# EAGLE board isp (EAGLE 9.6.2), part 1 of 2
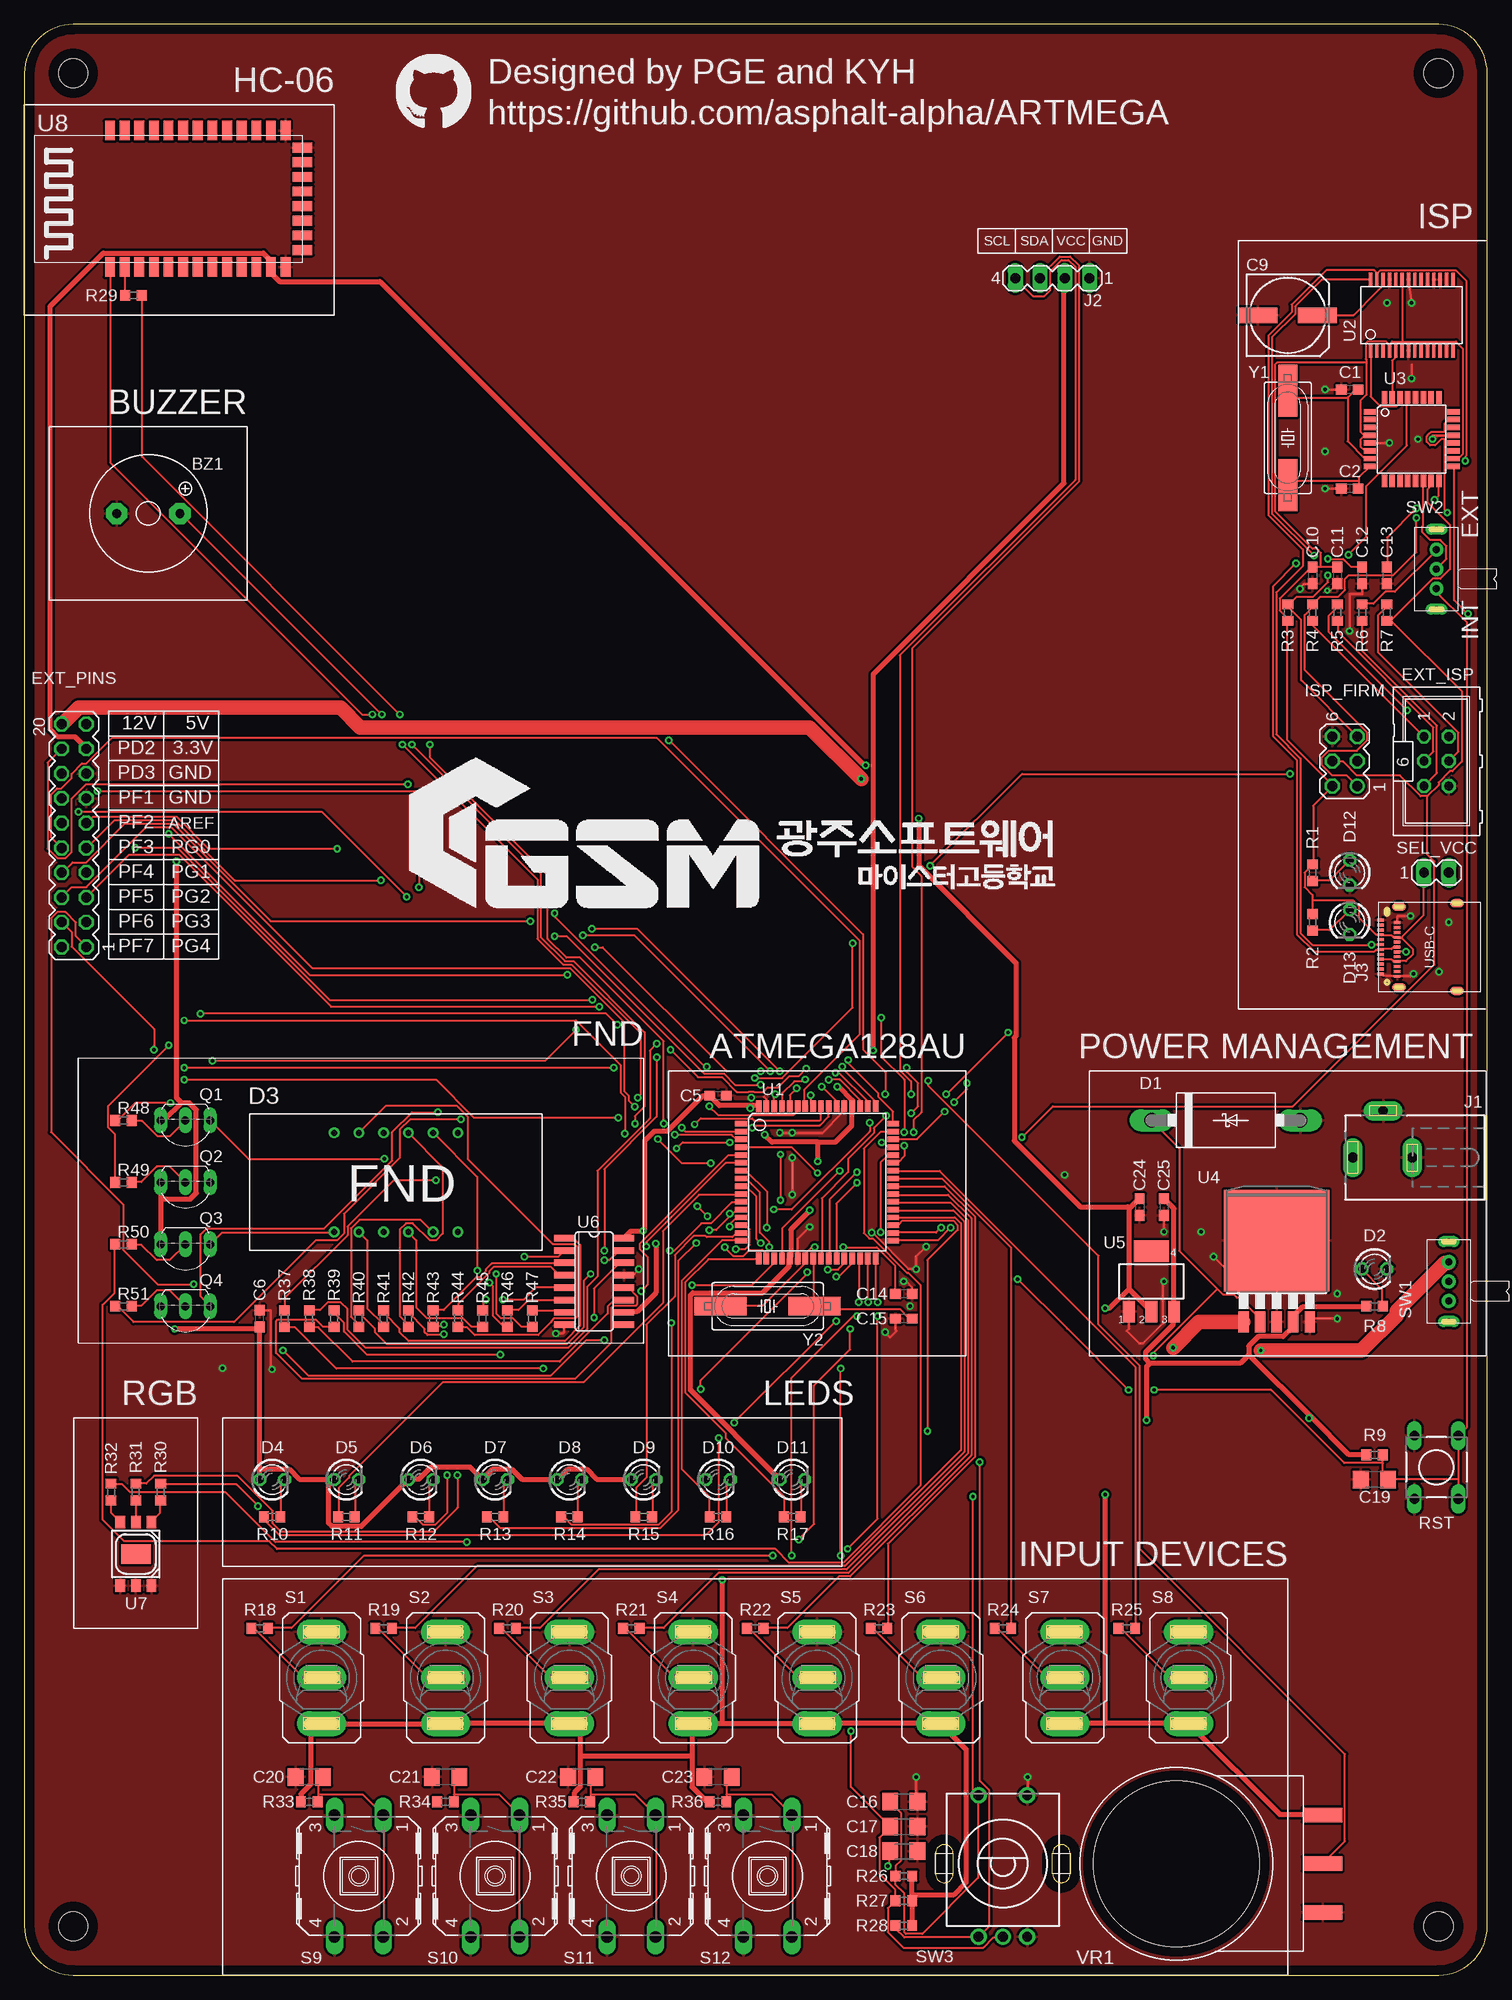
[diagram p0: board, top side]
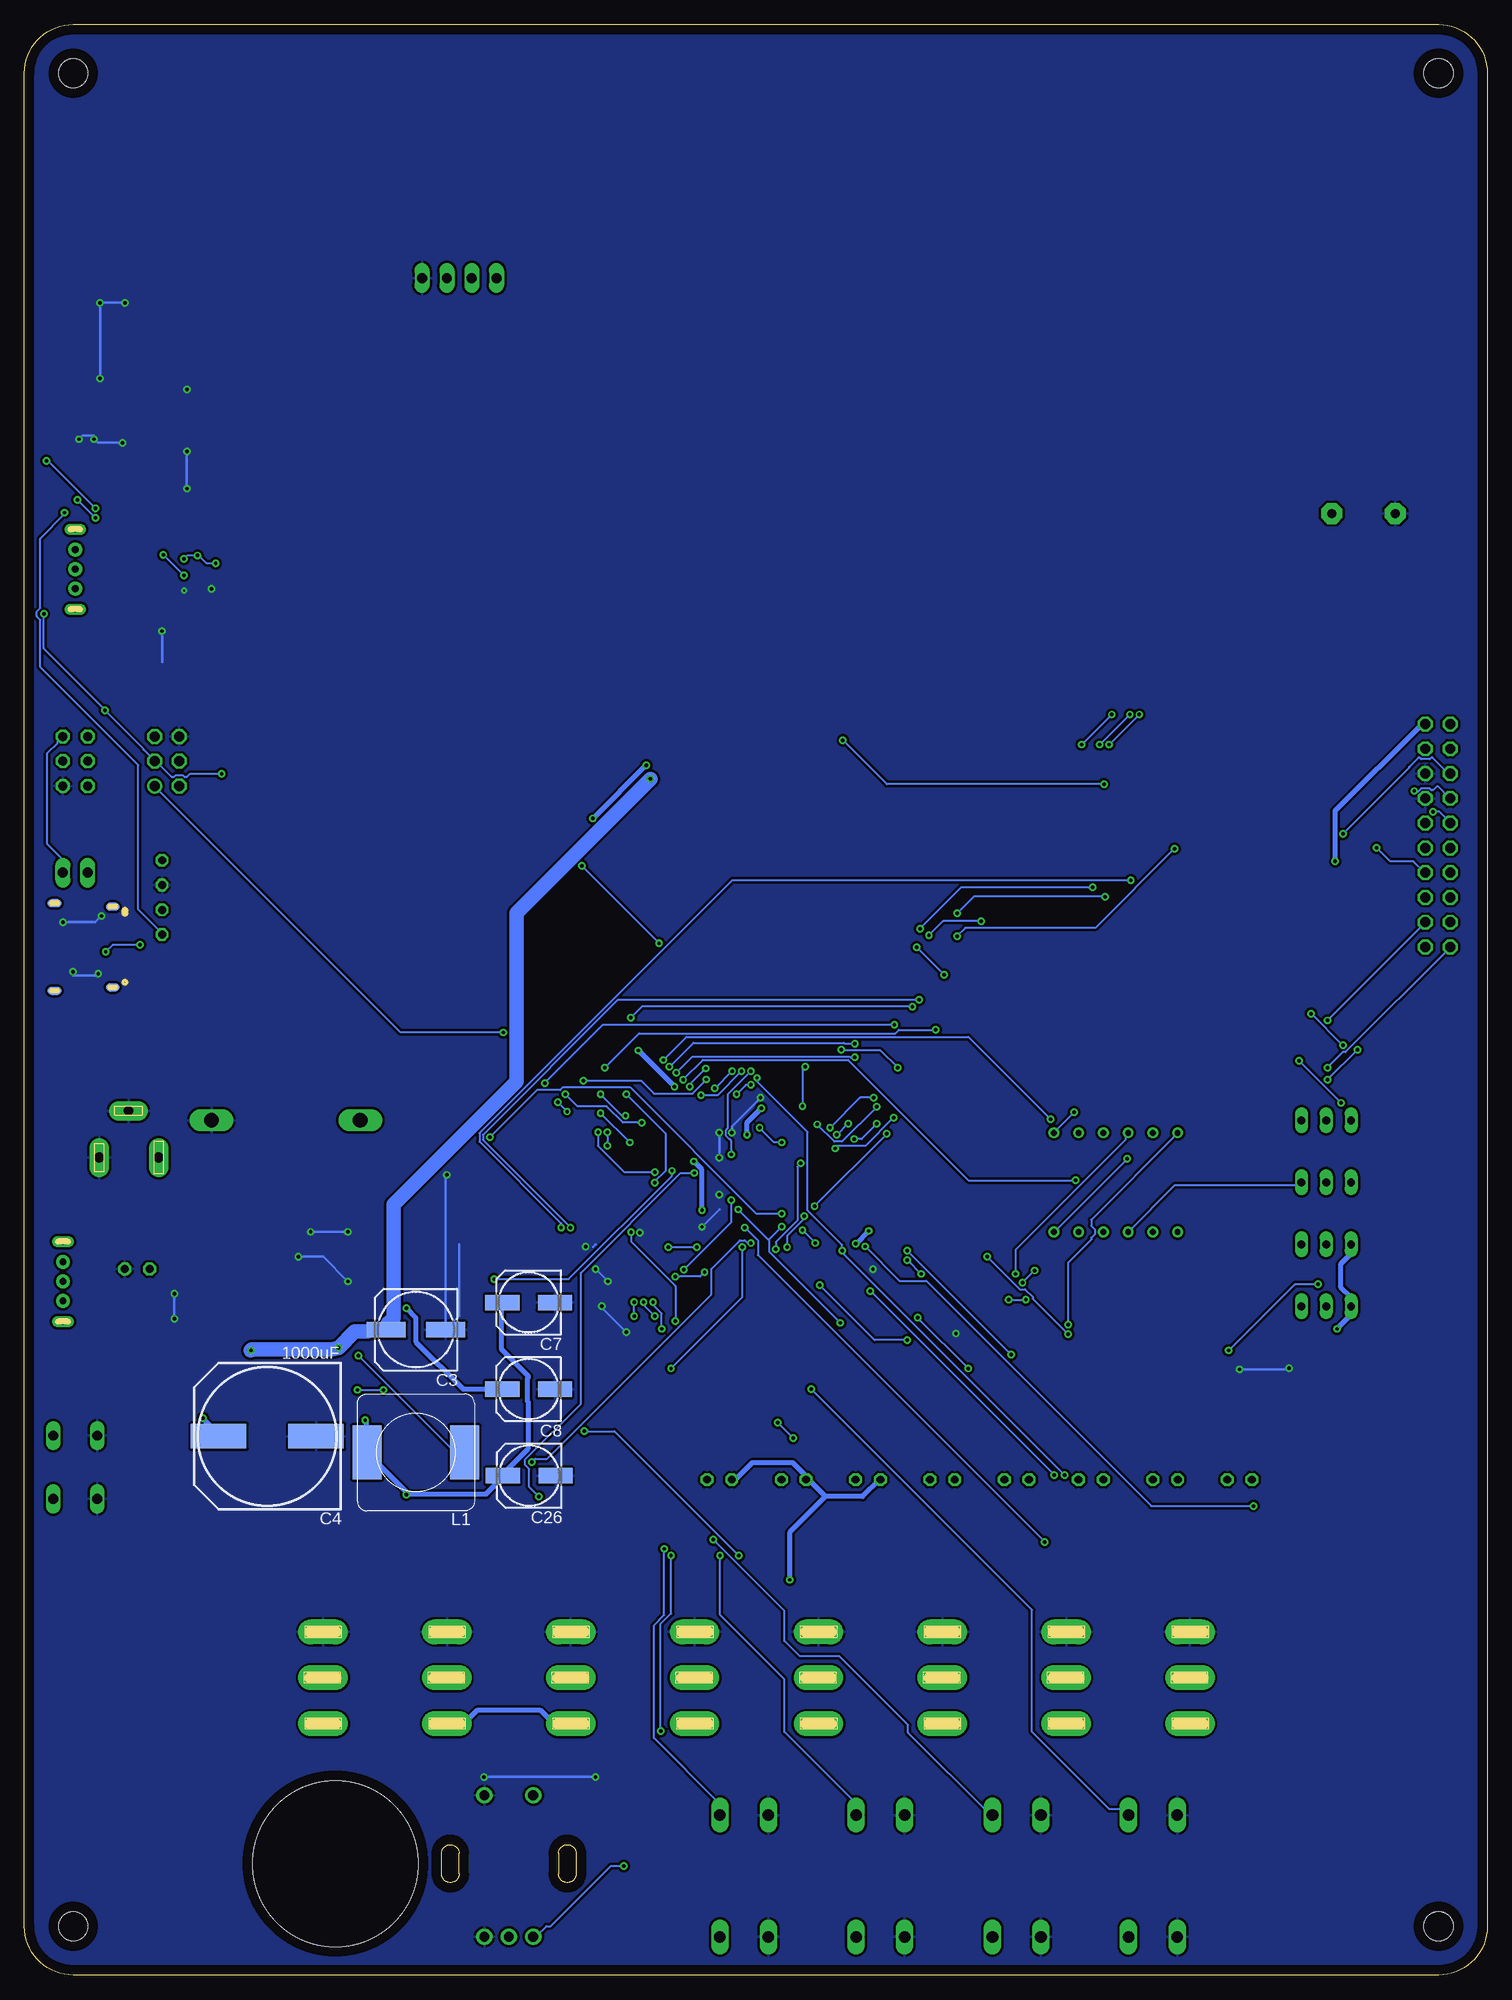
[diagram p1: board, bottom side, seen from below]

Size 150 x 200 mm. Coordinates in mm from the lower left corner, seen from the top.
Outline: 0,195 0,5 arc90 5,0 145,0 arc90 150,5 150,195 arc90 145,200 5,200 arc90 0,195
Copper layers (1*16): Top 0.035mm / dielectric 1.5mm / Bottom 0.035mm
Design rules "default": minimum track width 6mil, minimum drill 0.35mm, track to track 6mil, track to pad 6mil, pad to pad 6mil, via to via 6mil, smd to smd 6mil, copper to edge 40mil, drill to drill 6mil, minimum pad ring 10mil, minimum via ring 8mil, stop-mask expansion 4mil, vias tented up to drill 0mil, thermal gap 10mil
Net classes: 0 default: width 0.2 mm; 1 12V: width 1.5 mm; 2 VCCS: width 0.5 mm
Holes 3 mm at 5,195 145,195 5,5 145,5
Milling: 112 lines

## Footprints (pad centres in the part's own frame; a part is rotated, then mirrored left to right if it is on the bottom)
F/QMBIII = drill 0.914 pad 2.159 octagon: + 3.251,0; - -3.251,0
C0603 = smd 1.1 x 1: 1 -0.85,0; 2 0.85,0
153CLV-0807 = smd 4 x 1.6: + 3.05,0; - -3.05,0
MVG_K14 = smd 5.7 x 2.5: + 5,0; - -5,0
153CLV-0605 = smd 3.5 x 1.6: + 2.7,0; - -2.7,0
C1206 = smd 1.6 x 1.8: 1 -1.4,0; 2 1.4,0
DO201T15 = drill 1.499 long: A 7.62,0; C -7.62,0
LED3MM = drill 0.813 octagon: A -1.27,0; K 1.27,0
4CH_FND-DIP = drill 0.6: P$1 -3.81,5.08; P$2 -6.35,5.08; P$3 -1.27,5.08; P$4 1.27,5.08; P$5 3.81,5.08; P$6 6.35,5.08; P$7 -3.81,-5.08; P$8 -6.35,-5.08; P$9 -1.27,-5.08; P$10 1.27,-5.08; P$11 3.81,-5.08; P$12 6.35,-5.08
ML6 = drill 0.914 octagon: 1 -2.54,-1.27; 2 -2.54,1.27; 3 0,-1.27; 4 0,1.27; 5 2.54,-1.27; 6 2.54,1.27
MA10-2 = drill 1.016 octagon: 1 -11.43,-1.27; 2 -11.43,1.27; 3 -8.89,-1.27; 4 -8.89,1.27; 5 -6.35,-1.27; 6 -6.35,1.27; 7 -3.81,-1.27; 8 -3.81,1.27; 9 -1.27,-1.27; 10 -1.27,1.27; 11 1.27,-1.27; 12 1.27,1.27; 13 3.81,-1.27; 14 3.81,1.27; 15 6.35,-1.27; 16 6.35,1.27; 17 8.89,-1.27; 18 8.89,1.27; 19 11.43,-1.27; 20 11.43,1.27
MA03-2 = drill 1.016: 1 -2.54,-1.27 | drill 1.016 octagon: 2 -2.54,1.27; 3 0,-1.27; 4 0,1.27; 5 2.54,-1.27; 6 2.54,1.27
DCJ0303 = drill 1 pad 2 long: 1 0,3.1; 2 4.8,0; 3 0,-3
MA04-1 = drill 1.016 long: 1 -3.81,0; 2 -1.27,0; 3 1.27,0; 4 3.81,0
USB3.1-C-SMD = smd 0.8 x 1.4: @1 -4.13,-1.25; @3 4.13,-1.25; @5 -4.5,-7.2; @7 4.5,-7.2 | smd 0.8 x 1.4 bottom: @2 -4.13,-1.25; @4 4.13,-1.25; @6 -4.5,-7.2; @8 4.5,-7.2 | smd 0.3 x 0.7: A1 -2.75,0.65; A2 -2.25,0.65; A3 -1.75,0.65; A4 -1.25,0.65; A5 -0.75,0.65; A6 -0.25,0.65; A7 0.25,0.65; A8 0.75,0.65; A9 1.25,0.65; A10 1.75,0.65; A11 2.25,0.65; A12 2.75,0.65; B1 2.5,-1.05; B2 2,-1.05; B3 1.5,-1.05; B4 1,-1.05; B5 0.5,-1.05; B6 0,-1.05; B7 -0.5,-1.05; B8 -1,-1.05; B9 -1.5,-1.05; B10 -2,-1.05; B11 -2.5,-1.05; B12 -3,-1.05
212-032T2 = smd 5.5 x 3: 1 0,5; 2 0,-5
TO92-EBC = drill 0.813 long: B 0,-1.27; C 2.54,-1.27; E -2.54,-1.27
R0603 = smd 1 x 1.1: 1 -0.85,0; 2 0.85,0
DTS-6 = drill 1 long: 1 -3.25,2.25; 2 3.25,2.25; 3 -3.25,-2.25; 4 3.25,-2.25
M9040P = drill 0.01 pad 2.54 long: 1 0,4.699; 2 0,0; 3 0,-4.699
RACON12 = drill 1.194 long: 1 -6.248,2.489; 2 6.248,2.489; 3 -6.248,-2.489; 4 6.248,-2.489
MA02-1 = drill 1.016 long: 1 -1.27,0; 2 1.27,0
SLIDE-SW-DIP-SHIELD = drill 0.7 pad 1.4: 1 -2,0; 2 2,0; COM 0,0 | drill 0.6 long: @1 -4.1,0; @2 4.1,0
CI-11 = drill 1 pad 1.676: A -2.5,-7.5; B 0,-7.5; C 2.5,-7.5; D -2.5,7; E 2.5,7
TQFP64 = smd 1.194 x 0.559: 1 -7.8,6; 2 -7.8,5.2; 3 -7.8,4.4; 4 -7.8,3.6; 5 -7.8,2.8; 6 -7.8,2; 7 -7.8,1.2; 8 -7.8,0.4; 9 -7.8,-0.4; 10 -7.8,-1.2; 11 -7.8,-2; 12 -7.8,-2.8; 13 -7.8,-3.6; 14 -7.8,-4.4; 15 -7.8,-5.2; 16 -7.8,-6; 33 7.8,-6; 34 7.8,-5.2; 35 7.8,-4.4; 36 7.8,-3.6; 37 7.8,-2.8; 38 7.8,-2; 39 7.8,-1.2; 40 7.8,-0.4; 41 7.8,0.4; 42 7.8,1.2; 43 7.8,2; 44 7.8,2.8; 45 7.8,3.6; 46 7.8,4.4; 47 7.8,5.2; 48 7.8,6 | smd 0.559 x 1.194: 17 -6,-7.8; 18 -5.2,-7.8; 19 -4.4,-7.8; 20 -3.6,-7.8; 21 -2.8,-7.8; 22 -2,-7.8; 23 -1.2,-7.8; 24 -0.4,-7.8; 25 0.4,-7.8; 26 1.2,-7.8; 27 2,-7.8; 28 2.8,-7.8; 29 3.6,-7.8; 30 4.4,-7.8; 31 5.2,-7.8; 32 6,-7.8; 49 6,7.8; 50 5.2,7.8; 51 4.4,7.8; 52 3.6,7.8; 53 2.8,7.8; 54 2,7.8; 55 1.2,7.8; 56 0.4,7.8; 57 -0.4,7.8; 58 -1.2,7.8; 59 -2,7.8; 60 -2.8,7.8; 61 -3.6,7.8; 62 -4.4,7.8; 63 -5.2,7.8; 64 -6,7.8
SSOP28 = smd 0.348 x 1.397: 1 -4.225,-3.656; 2 -3.575,-3.656; 3 -2.925,-3.656; 4 -2.275,-3.656; 5 -1.625,-3.656; 6 -0.975,-3.656; 7 -0.325,-3.656; 8 0.325,-3.656; 9 0.975,-3.656; 10 1.625,-3.656; 11 2.275,-3.656; 12 2.925,-3.656; 13 3.575,-3.656; 14 4.225,-3.656; 15 4.225,3.656; 16 3.575,3.656; 17 2.925,3.656; 18 2.275,3.656; 19 1.625,3.656; 20 0.975,3.656; 21 0.325,3.656; 22 -0.325,3.656; 23 -0.975,3.656; 24 -1.625,3.656; 25 -2.275,3.656; 26 -2.925,3.656; 27 -3.575,3.656; 28 -4.225,3.656
TQFP32-08 = smd 1.27 x 0.559: 1 -4.293,2.8; 2 -4.293,2; 3 -4.293,1.2; 4 -4.293,0.4; 5 -4.293,-0.4; 6 -4.293,-1.2; 7 -4.293,-2; 8 -4.293,-2.8; 17 4.293,-2.8; 18 4.293,-2; 19 4.293,-1.2; 20 4.293,-0.4; 21 4.293,0.4; 22 4.293,1.2; 23 4.293,2; 24 4.293,2.8 | smd 0.559 x 1.27: 9 -2.8,-4.293; 10 -2,-4.293; 11 -1.2,-4.293; 12 -0.4,-4.293; 13 0.4,-4.293; 14 1.2,-4.293; 15 2,-4.293; 16 2.8,-4.293; 25 2.8,4.293; 26 2,4.293; 27 1.2,4.293; 28 0.4,4.293; 29 -0.4,4.293; 30 -1.2,4.293; 31 -2,4.293; 32 -2.8,4.293
TO263-5 = smd 1.067 x 2.159: 1 -3.404,-5.791; 2 -1.702,-5.791; 3 0,-5.791; 4 1.702,-5.791; 5 3.404,-5.791 | smd 10.8 x 10.41: 6 0,2.54
SOT223 = smd 1.219 x 2.235: 1 -2.311,-3.099; 2 0,-3.099; 3 2.311,-3.099 | smd 3.6 x 2.2: 4 0,3.099
SO16 = smd 0.66 x 2.032: 1 -4.445,-3.073; 2 -3.175,-3.073; 3 -1.905,-3.073; 4 -0.635,-3.073; 5 0.635,-3.073; 6 1.905,-3.073; 7 3.175,-3.073; 8 4.445,-3.073; 9 4.445,3.073; 10 3.175,3.073; 11 1.905,3.073; 12 0.635,3.073; 13 -0.635,3.073; 14 -1.905,3.073; 15 -3.175,3.073; 16 -4.445,3.073
LP2C63-ST-RGB-SR0 = smd 1.3 x 1: 1 -3.25,1.6; 2 -3.25,0; 3 -3.25,-1.6; 4 3.25,-1.6; 5 3.25,0; 6 3.25,1.6 | smd 2 x 3: TH 0,0
HC06-SMD = smd 2 x 1: 1 -6.5,9; 2 -6.5,7.5; 3 -6.5,6; 4 -6.5,4.5; 5 -6.5,3; 6 -6.5,1.5; 7 -6.5,0; 8 -6.5,-1.5; 9 -6.5,-3; 10 -6.5,-4.5; 11 -6.5,-6; 12 -6.5,-7.5; 13 -6.5,-9; 22 7.5,-9; 23 7.5,-7.5; 24 7.5,-6; 25 7.5,-4.5; 26 7.5,-3; 27 7.5,-1.5; 28 7.5,0; 29 7.5,1.5; 30 7.5,3; 31 7.5,4.5; 32 7.5,6; 33 7.5,7.5; 34 7.5,9 | smd 1 x 2: 14 -4.75,-10.75; 15 -3.25,-10.75; 16 -1.75,-10.75; 17 -0.25,-10.75; 18 1.25,-10.75; 19 2.75,-10.75; 20 4.25,-10.75; 21 5.75,-10.75
VARES-SMD = smd 1.5 x 4: 1 -5,-15; 2 0,-15; 3 5,-15 | hole 17: 0,0
HC49UP = smd 5.334 x 1.93: 1 -4.826,0; 2 4.826,0

## Placement (x,y rotation side)
BZ1  F/QMBIII  [F/QMBIII]  12.7,149.86 0 top
C1  20pF  [C0603]  135.89,162.56 180 top
C2  20pF  [C0603]  135.89,152.4 180 top
C3  100uF  [153CLV-0807]  109.86,66.17 180 bottom
C4  1000uF  [MVG_K14]  125.09,55.24 180 bottom
C5  0.1uF  [C0603]  71.12,90.17 0 top
C6  0.1uF  [C0603]  24.13,67.31 90 top
C7  10uF  [153CLV-0605]  98.3,68.96 180 bottom
C8  10uF  [153CLV-0605]  98.3,60.07 180 bottom
C9  100uF  [153CLV-0807]  129.54,170.18 0 top
C10  0.1uF  [C0603]  132.08,143.51 270 top
C11  0.1uF  [C0603]  134.62,143.51 270 top
C12  15pF  [C0603]  137.16,143.51 270 top
C13  15pF  [C0603]  139.7,143.51 270 top
C14  22pF  [C0603]  90.17,69.85 180 top
C15  22pF  [C0603]  90.17,67.31 180 top
C16  470nF  [C1206]  90.17,17.78 0 top
C17  470nF  [C1206]  90.17,15.24 0 top
C18  470nF  [C1206]  90.17,12.7 0 top
C19  470nF  [C1206]  138.43,50.8 180 top
C20  470nF  [C1206]  29.21,20.32 180 top
C21  470nF  [C1206]  43.18,20.32 180 top
C22  470nF  [C1206]  57.15,20.32 180 top
C23  470nF  [C1206]  71.12,20.32 180 top
C24  0.1uF  [C0603]  114.35,78.74 270 top
C25  0.1uF  [C0603]  116.83,78.74 270 top
C26  10uF  [153CLV-0605]  98.25,51.2 180 bottom
D1  1N5822  [DO201T15]  123.19,87.63 0 top
D2  R  [LED3MM]  138.43,72.39 0 top
D3  4CH_FND-DIP  [4CH_FND-DIP]  38.1,81.28 0 top
D4  R  [LED3MM]  25.4,50.8 0 top
D5  R  [LED3MM]  33.02,50.8 0 top
D6  R  [LED3MM]  40.64,50.8 0 top
D7  R  [LED3MM]  48.26,50.8 0 top
D8  R  [LED3MM]  55.88,50.8 0 top
D9  R  [LED3MM]  63.5,50.8 0 top
D10  R  [LED3MM]  71.12,50.8 0 top
D11  R  [LED3MM]  78.74,50.8 0 top
D12  R  [LED3MM]  135.89,113.03 270 top
D13  G  [LED3MM]  135.89,107.95 270 top
EXT_ISP  ISP  [ML6]  144.78,124.46 270 top
EXT_PINS  EXT_HEADER  [MA10-2]  5.08,116.84 90 top
ISP_FIRM  FIRMWARE  [MA03-2]  135.38,124.46 90 top
J1  +12V  [DCJ0303]  139.32,83.82 90 top
J2  LCD  [MA04-1]  105.41,173.99 180 top
J3  [USB3.1-C-SMD]  139.7,105.41 90 top
L1  100uH  [212-032T2]  109.86,53.59 270 bottom
Q1  2N2222A  [TO92-EBC]  16.51,86.36 180 top
Q2  2N2222A  [TO92-EBC]  16.51,80.01 180 top
Q3  2N2222A  [TO92-EBC]  16.51,73.66 180 top
Q4  2N2222A  [TO92-EBC]  16.51,67.31 180 top
R1  330  [R0603]  132.08,113.03 90 top
R2  330  [R0603]  132.08,107.95 90 top
R3  10K  [R0603]  129.54,139.7 270 top
R4  100  [R0603]  132.08,139.7 270 top
R5  100  [R0603]  134.62,139.7 270 top
R6  100  [R0603]  137.16,139.7 270 top
R7  100  [R0603]  139.7,139.7 270 top
R8  330  [R0603]  138.43,68.58 180 top
R9  10K  [R0603]  138.43,53.34 180 top
R10  330  [R0603]  25.4,46.99 180 top
R11  330  [R0603]  33.02,46.99 180 top
R12  330  [R0603]  40.64,46.99 180 top
R13  330  [R0603]  48.26,46.99 180 top
R14  330  [R0603]  55.88,46.99 180 top
R15  330  [R0603]  63.5,46.99 180 top
R16  330  [R0603]  71.12,46.99 180 top
R17  330  [R0603]  78.74,46.99 180 top
R18  10K  [R0603]  24.13,35.56 0 top
R19  10K  [R0603]  36.83,35.56 0 top
R20  10K  [R0603]  49.53,35.56 0 top
R21  10K  [R0603]  62.23,35.56 0 top
R22  10K  [R0603]  74.93,35.56 0 top
R23  10K  [R0603]  87.63,35.56 0 top
R24  10K  [R0603]  100.33,35.56 0 top
R25  10K  [R0603]  113.03,35.56 0 top
R26  10K  [R0603]  90.17,10.16 0 top
R27  10K  [R0603]  90.17,7.62 0 top
R28  10K  [R0603]  90.17,5.08 0 top
R29  330  [R0603]  11.18,172.21 180 top
R30  330  [R0603]  13.97,49.53 90 top
R31  330  [R0603]  11.43,49.53 90 top
R32  330  [R0603]  8.89,49.53 90 top
R33  10K  [R0603]  29.21,17.78 180 top
R34  10K  [R0603]  43.18,17.78 180 top
R35  10K  [R0603]  57.15,17.78 180 top
R36  10K  [R0603]  71.12,17.78 180 top
R37  10K  [R0603]  26.67,67.31 270 top
R38  10K  [R0603]  29.21,67.31 270 top
R39  10K  [R0603]  31.75,67.31 270 top
R40  330  [R0603]  34.29,67.31 270 top
R41  330  [R0603]  36.83,67.31 270 top
R42  330  [R0603]  39.37,67.31 270 top
R43  330  [R0603]  41.91,67.31 270 top
R44  330  [R0603]  44.45,67.31 270 top
R45  330  [R0603]  46.99,67.31 270 top
R46  330  [R0603]  49.53,67.31 270 top
R47  330  [R0603]  52.07,67.31 270 top
R48  330  [R0603]  10.16,87.63 0 top
R49  330  [R0603]  10.16,81.28 0 top
R50  330  [R0603]  10.16,74.93 0 top
R51  330  [R0603]  10.16,68.58 0 top
RST  DTS-6  [DTS-6]  144.78,52.07 90 top
S1  [M9040P]  30.48,30.48 0 top
S2  [M9040P]  43.18,30.48 0 top
S3  [M9040P]  55.88,30.48 0 top
S4  [M9040P]  68.58,30.48 0 top
S5  [M9040P]  81.28,30.48 0 top
S6  [M9040P]  93.98,30.48 0 top
S7  [M9040P]  106.68,30.48 0 top
S8  [M9040P]  119.38,30.48 0 top
S9  RACON12  [RACON12]  34.29,10.16 270 top
S10  RACON12  [RACON12]  48.26,10.16 270 top
S11  RACON12  [RACON12]  62.23,10.16 270 top
S12  RACON12  [RACON12]  76.2,10.16 270 top
SEL_VCC  VCC_SEL  [MA02-1]  144.78,113.03 0 top
SW1  [SLIDE-SW-DIP-SHIELD]  146.05,71.12 90 top
SW2  [SLIDE-SW-DIP-SHIELD]  144.78,144.15 90 top
SW3  CI-11  [CI-11]  100.33,11.43 0 top
U1  MEGA128-A  [TQFP64]  81.28,81.28 0 top
U2  FT232RL  [SSOP28]  142.24,170.18 0 top
U3  MEGA8_-AU  [TQFP32-08]  142.24,157.48 0 top
U4  LM2576S  [TO263-5]  128.4,72.77 0 top
U5  LM1117-3.3  [SOT223]  115.57,71.12 0 top
U6  74LS595D  [SO16]  58.42,71.12 270 top
U7  LP2C63-ST-RGB-SR0  [LP2C63-ST-RGB-SR0]  11.43,43.18 270 top
U8  HC06-SMD  [HC06-SMD]  17.78,181.61 90 top
VR1  VARES-SMD  [VARES-SMD]  118.11,11.43 90 top
Y1  3.6864MHz  [HC49UP]  129.54,157.61 90 top
Y2  14.7456MHz  [HC49UP]  76.2,68.58 180 top

## Library data of the parts
BZ1 = buzzer; OC_FARNELL: unknown; OC_NEWARK: unknown
C1-C3 C5-C26 = rcl; SPICEPREFIX: C
C4 D3 J3 L1 RST S1-S8 SEL_VCC SW1 SW2 U2 U6 U8 VR1 = ARTMEGA
D1 = diode
D2 D4-D13 U7 = led
EXT_ISP = con-harting-ml; OC_FARNELL: unknown; OC_NEWARK: unknown
EXT_PINS ISP_FIRM J2 = con-lstb; OC_FARNELL: unknown; OC_NEWARK: unknown
J1 = con-jack; OC_FARNELL: unknown; OC_NEWARK: unknown
Q1-Q4 = transistor-neu-to92
R1-R51 = rcl; SPICEPREFIX: R
S9-S12 = switch-misc
SW3 = piher; OC_FARNELL: unknown; OC_NEWARK: unknown
U1 = atmel; MPN: ATMEGA128-16AU; OC_FARNELL: 9171118; OC_NEWARK: 95K7364
U3 = avr-4
U4 U5 = linear
Y1 Y2 = crystal; OC_FARNELL: unknown; OC_NEWARK: unknown

## Nets
+3.3V [VCCS]: C8.+ C24.1 EXT_PINS.17 U5.2 U8.12
+12V [12V]: C3.+ EXT_PINS.20 SW1.2 U4.1
AREF: EXT_PINS.11 U1.62
BUSY: D13.K U3.23
DM: C13.1 J3.A7 J3.B7 U2.27
DP: C12.1 J3.A6 J3.B6 U2.28
EXT_RST_SIG: R6.1 SW2.2
GND: BZ1.- C1.2 C2.2 C3.- C4.- C5.2 C6.2 C7.- C8.- C9.- C10.2 C11.2 C12.2 C13.2 C14.1 C15.2 C16.2 C17.2 C18.2 C19.2 C20.2 C21.2 C22.2 C23.2 C24.2 C25.2 C26.- D1.A D2.K D12.K EXT_ISP.6 EXT_PINS.13 EXT_PINS.15 ISP_FIRM.6 J1.2 J1.3 J2.1 J3.A1 J3.A12 J3.B1 J3.B12 RST.1 RST.2 S1.1 S2.1 S3.1 S4.1 S5.1 S6.1 S7.1 S8.1 S9.3 S9.4 S10.3 S10.4 S11.3 S11.4 S12.3 S12.4 SW3.C SW3.E U1.22 U1.53 U1.63 U2.7 U2.17 U2.18 U2.22 U2.25 U3.3 U3.5 U3.21 U4.3 U4.5 U4.6 U5.1 U6.8 U6.13 U7.4 U7.5 U7.6 U8.13 U8.21 U8.22 VR1.1
N$1: D12.A R1.1
N$2: D1.C L1.1 U4.2
N$3: D13.A R2.1
N$4: EXT_ISP.1 R4.2
N$5: EXT_ISP.3 R5.2
N$6: EXT_ISP.5 R6.2
N$7: EXT_ISP.4 R7.1
N$8: EXT_ISP.2 SEL_VCC.2
N$9: D2.A R8.1
N$10: C9.+ U2.26
N$12: D4.K R10.1
N$13: D5.K R11.1
N$14: D6.K R12.1
N$15: D7.K R13.1
N$16: D8.K R14.1
N$17: D9.K R15.1
N$18: D10.K R16.1
N$19: D11.K R17.1
N$20: R18.1 S1.2
N$21: R19.1 S2.2
N$22: R20.1 S3.2
N$23: R21.1 S4.2
N$24: R22.1 S5.2
N$25: R23.1 S6.2
N$26: R24.1 S7.2
N$27: R25.1 S8.2
N$28: R29.2 U8.2
N$29: R30.1 U7.1
N$30: R31.1 U7.2
N$31: R32.1 U7.3
N$32: R37.2 U6.14
N$33: R39.2 U6.12
N$34: Q1.B R48.2
N$35: Q2.B R49.2
N$36: Q3.B R50.2
N$37: Q4.B R51.2
N$38: D3.P$12 Q1.E
N$39: D3.P$9 Q2.E
N$40: R38.2 U6.11
N$41: R40.1 U6.15
N$42: R41.1 U6.1
N$43: R42.1 U6.2
N$44: R43.1 U6.3
N$45: R44.1 U6.4
N$46: R45.1 U6.5
N$47: R46.1 U6.6
N$48: R47.1 U6.7
N$49: D3.P$11 R40.2
N$50: D3.P$7 R41.2
N$51: D3.P$4 R42.2
N$52: D3.P$2 R43.2
N$53: D3.P$1 R44.2
N$54: D3.P$10 R45.2
N$55: D3.P$5 R46.2
N$56: D3.P$3 R47.2
N$57: D3.P$8 Q3.E
N$58: D3.P$6 Q4.E
PA0: R37.1 U1.51
PA1: R39.1 U1.50
PA2: R38.1 U1.49
PA3: R51.1 U1.48
PA4: R50.1 U1.47
PA5: R49.1 U1.46
PA6: R48.1 U1.45
PA7: R10.2 U1.44
PB0: R11.2 U1.10
PB1/SCK: ISP_FIRM.3 R5.1 R12.2 U1.11 U3.17
PB2/MOSI: ISP_FIRM.4 R7.2 R13.2 U1.12 U3.15
PB3/MISO: ISP_FIRM.1 R4.1 R14.2 U1.13 U3.16
PB4: BZ1.+ U1.14
PB5: R15.2 U1.15
PB6: R16.2 U1.16
PB7: R17.2 U1.17
PC0: R18.2 U1.35
PC1: R19.2 U1.36
PC2: R20.2 U1.37
PC3: R21.2 U1.38
PC4: R22.2 U1.39
PC5: R23.2 U1.40
PC6: R24.2 U1.41
PC7: R25.2 U1.42
PD0: J2.4 U1.25
PD1: J2.3 U1.26
PD2: EXT_PINS.18 U1.27
PD3: EXT_PINS.16 U1.28
PD4: C20.1 R33.1 S9.1 S9.2 U1.29
PD5: C21.1 R34.1 S10.1 S10.2 U1.30
PD6: C22.1 R35.1 S11.1 S11.2 U1.31
PD7: C23.1 R36.1 S12.1 S12.2 U1.32
PE0: U1.2 U8.1
PE1: R29.1 U1.3
PE2: C16.1 R26.1 SW3.D U1.4
PE3: R31.2 U1.5
PE4: R30.2 U1.6
PE5: R32.2 U1.7
PE6: C17.1 R27.1 SW3.B U1.8
PE7: C18.1 R28.1 SW3.A U1.9
PF0: U1.61 VR1.2
PF1: EXT_PINS.14 U1.60
PF2: EXT_PINS.12 U1.59
PF3: EXT_PINS.10 U1.58
PF4: EXT_PINS.8 U1.57
PF5: EXT_PINS.6 U1.56
PF6: EXT_PINS.4 U1.55
PF7: EXT_PINS.2 U1.54
PG0: EXT_PINS.9 U1.33
PG1: EXT_PINS.7 U1.34
PG2: EXT_PINS.5 U1.43
PG3: EXT_PINS.3 U1.18
PG4: EXT_PINS.1 U1.19
RESET: C19.1 R9.1 RST.3 RST.4 SW2.1 U1.20
RST_PIN: ISP_FIRM.5 R3.1 U3.29
RXD: U2.1 U3.30
SS_SIG: SW2.COM U3.14
TXD: U2.5 U3.31
VBUS: C10.1 C11.1 ISP_FIRM.2 J3.A4 J3.A9 J3.B4 J3.B9 R1.2 R2.2 R3.2 SEL_VCC.1 U2.4 U2.23 U3.4 U3.6 U3.18
VCC [VCCS]: C4.+ C5.1 C6.1 C7.+ C25.1 C26.+ D4.A D5.A D6.A D7.A D8.A D9.A D10.A D11.A EXT_PINS.19 J2.2 L1.2 Q1.C Q2.C Q3.C Q4.C R8.2 R9.2 R26.2 R27.2 R28.2 R33.2 R35.2 R36.2 S1.3 S2.3 S3.3 S4.3 S5.3 S6.3 S7.3 S8.3 U1.21 U1.52 U1.64 U4.4 U5.3 U6.10 U6.16 VR1.3
X1: C1.1 U3.7 Y1.2
X2: C2.1 U3.8 Y1.1
XTAL1: C15.1 U1.24 Y2.1
XTAL2: C14.2 U1.23 Y2.2